# Allegro board ESP32_WROVER_ITESO_BRD_O2024.brd
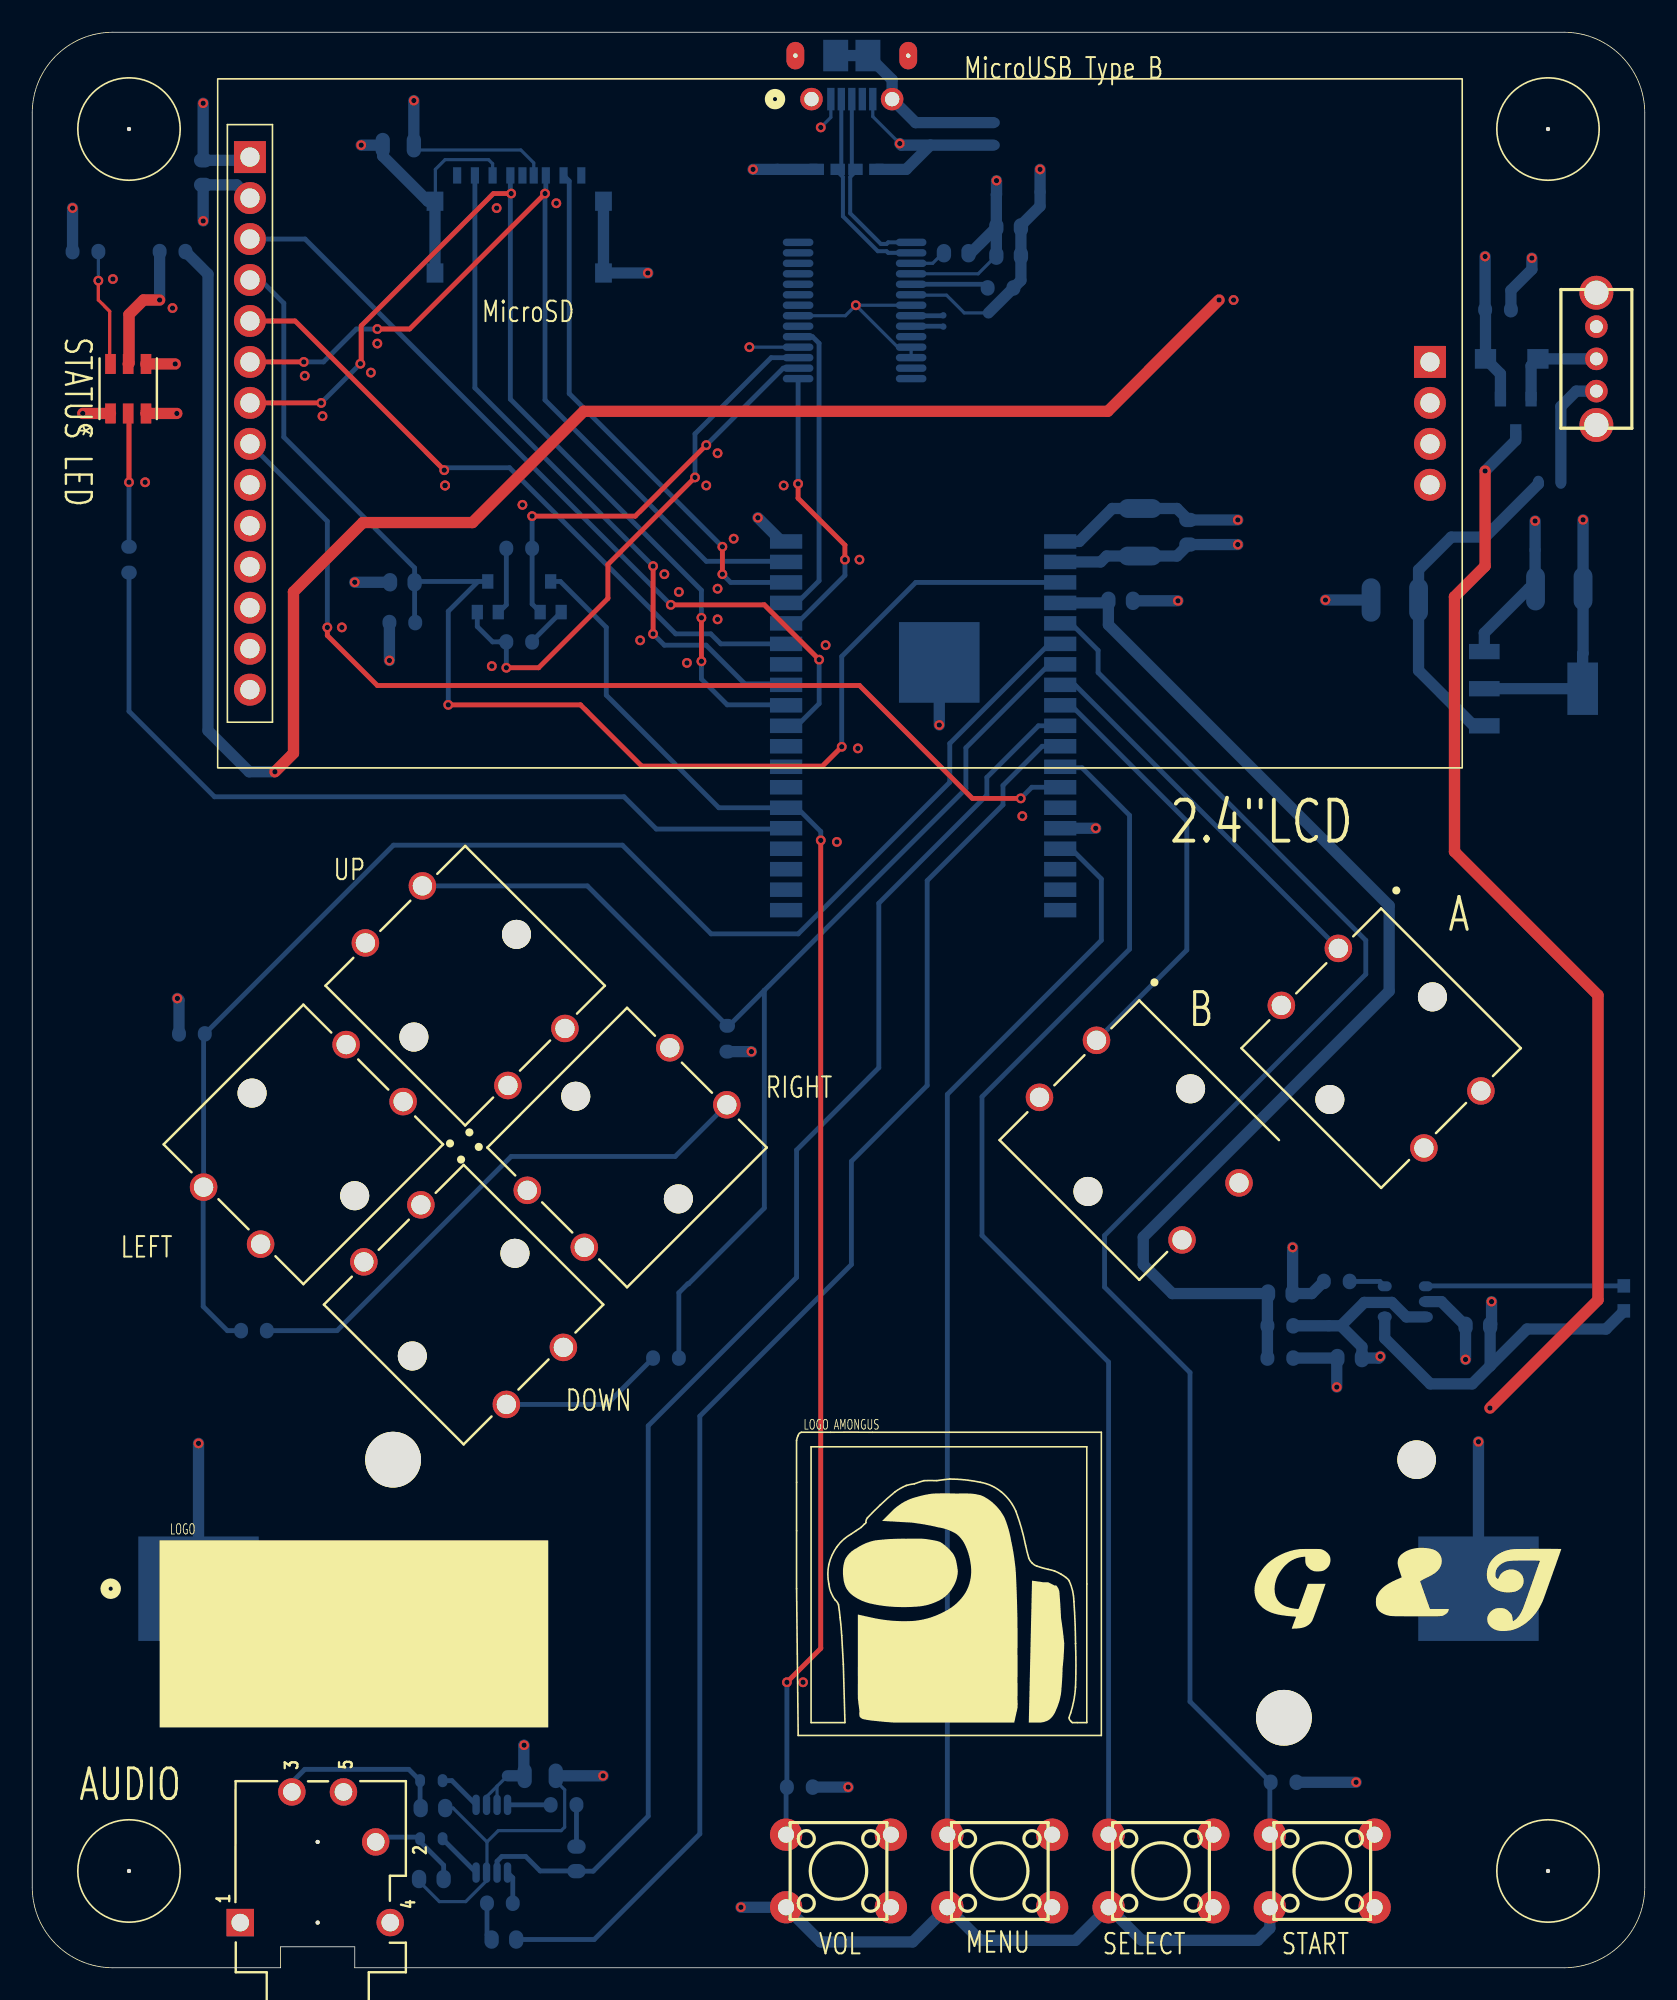
[diagram p0: board, top side]
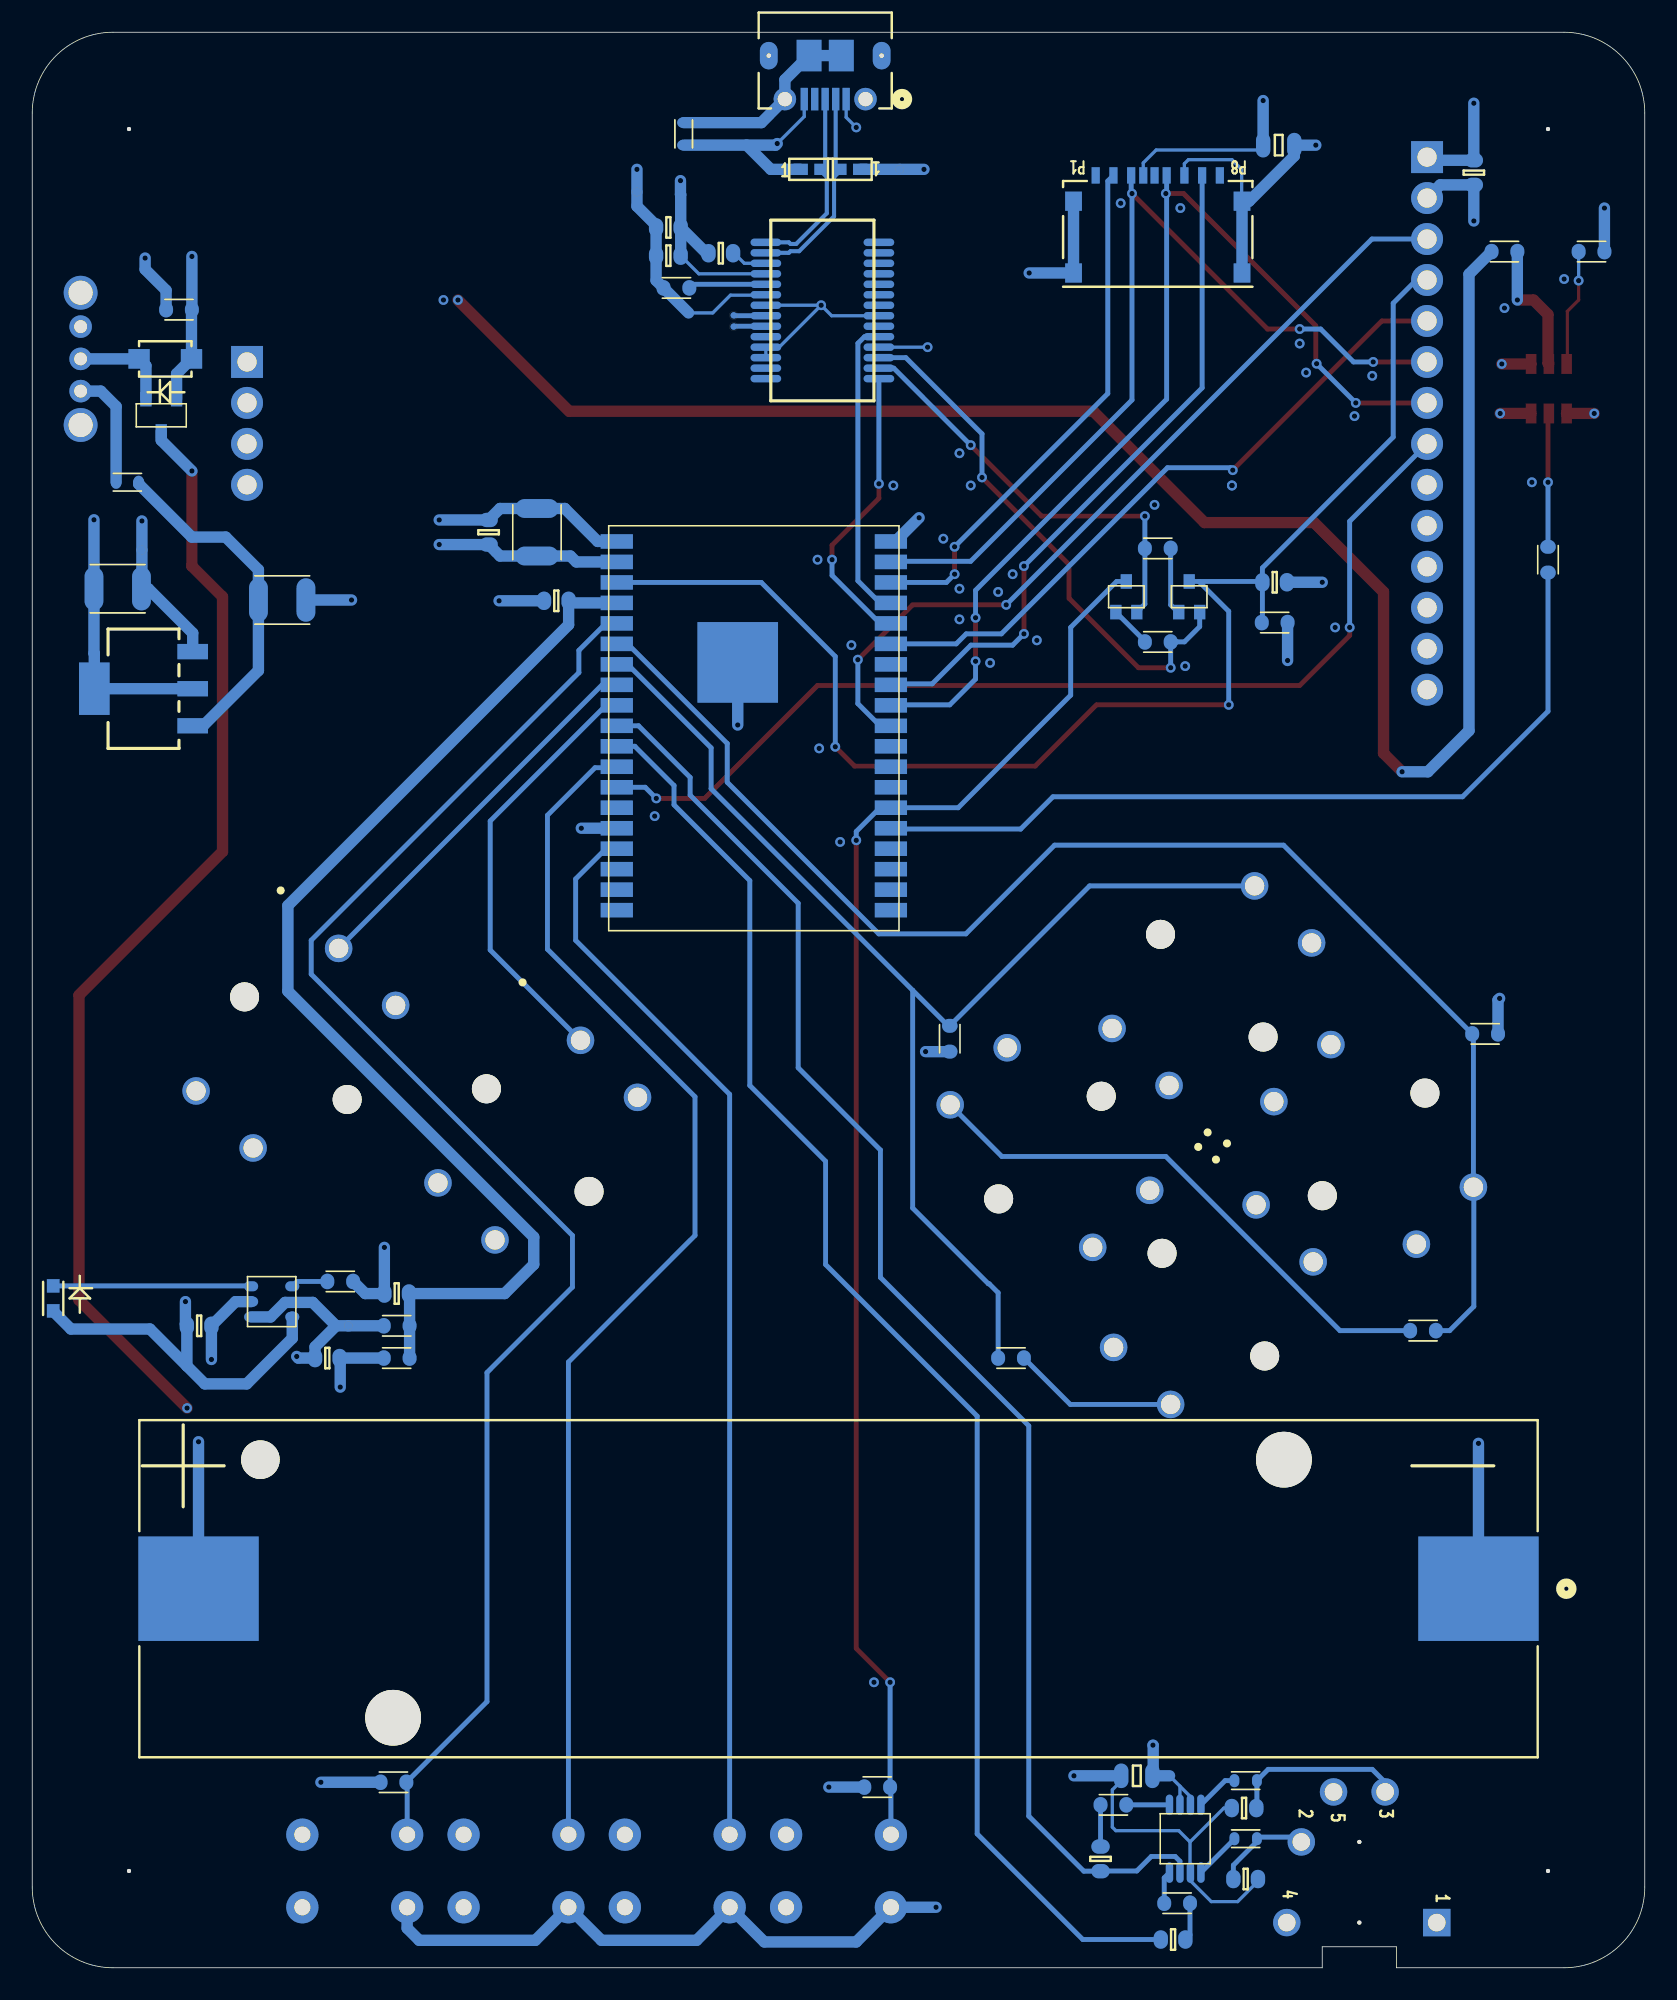
[diagram p1: board, bottom side, seen from below]

Outline 100 x 120 mm; copper layers: TOP, PWR, GND, BOTTOM. Coordinates in mm from the lower left corner of the outline.
Outline path: 0,115 0,5 arc(1.46,1.46) 5,0 15.4,0 15.4,1.3 20,1.3 20,0 95,0 arc(98.54,1.46) 100,5 100,115 arc(98.54,118.54) 95,120 5,120 arc(1.46,118.54) 0,115

## Design rules (mm)
constraint set DEFAULT: 
net group USB_D: nets USB_DN USB_DP
net group EC_AUDIO: nets AUDIO_IN+ AUDIO_IN+_R AUDIO_IN- AUDIO_IN-_R AUDIO_OUT+ AUDIO_OUT+_L AUDIO_OUT- AUDIO_OUT-_L
net group EC_MISC: nets CBUS0 CBUS1 FT232_RST IO0 IO2 IO4 IO12 IO13 IO14 IO15 IO21 IO25 IO26 IO27 IO32 IO33 IO34 IO34_R IO35 IO35_R IO36 IO39 ISEN_CHRGR N00559 RESET STATUS_LED
net group EC_UART: nets DTR_N DTR_N_R RTS_N RTS_N_R UART_RXD UART_TXD
net group PWR: nets FT232_P3V3OUT P3V3_LED P5V0_P3V7 P5V0_P3V7_IN P5V0_P3V7_L P5V0_USB_LED

## Placement (name value [footprint] x y rotation side)
C1  0.1uF  [CC0603_OV]  77.4 41.8 180 bottom
C2  0.1uF  [CC0603_OV]  81.7 37.8 0 bottom
C3  47uF  [CC1210_OV]  84.5 84.8 0 bottom
C4  47uF  [CC1210_OV]  94.7 85.5 180 bottom
C5  4.7uF  [CC0603_OV]  89.65 39.8 0 bottom
C6  47uF  [CC1210_OV]  68.7 89 270 bottom
C7  0.1uF  [CC0603_OV]  71.7 89 270 bottom
C8  0.1uF  [CC0603_OV]  67.5 84.75 180 bottom
C9  0.1uF  [CC0603_OV]  22.95 85.9 0 bottom
C11  4.7uF  [CC0603_OV]  60.55 106.15 0 bottom
C12  0.1uF  [CC0603_OV]  60.55 107.9 0 bottom
C13  0.1uF  [CC0603_OV]  57.3 106.3 0 bottom
C15  10uF  [CC0805_OV]  22.7 113 0 bottom
C16  0.1uF  [CC0603_OV]  10.6 111.3 90 bottom
C18  0.1uF  [CC0603_OV]  29.25 1.75 180 bottom
C19  0.1uF  [CC0603_OV]  33.75 6.75 90 bottom
C20  220pF  [CC0603_OV]  24.85 9.9 180 bottom
C21  220pF  [CC0603_OV]  24.75 5.5 0 bottom
C22  10uF  [CC0805_OV]  31.5 11.9 180 bottom
D1  598-8060-107F  [LED_0603]  98.7 41.5 90 bottom
D2  MBR120VLSFT1G  [SOD-123]  91.75 99.75 0 bottom
D3  0402ESDA-MLP1  [0402_MLP]  51.7 111.5 180 bottom
D4  0402ESDA-MLP1  [0402_MLP]  49.3 111.5 0 bottom
D8  SMD06_LED_E3635_3P5X3P3  [SMD06_LED_E3635_3P5X3P3_OSR]  5.95 97.9 90 top
J2  SJ-43515TS  [CON5_AUD_JACK_RA_TH_SJ-43515TS]  12.9 2.8 90 top
J4  2.4" 240x320 SPI TFT ILI9341 with SD  [TFT_2P4_INCH_18PIN]  13.5 95.75 0 top
J5  1050270001  [CON8_SDCARD_PUSH_SM]  30.2 107.2 0 bottom
J6  1042P  [1042P_KEY]  50 23.5 0 bottom
J7  1050170001  [CONN_1050170001_MOL]  50.83 118.25 0 bottom
L1  330  [L0603_OV]  94.1 92.1 180 bottom
L2  330  [L0603_OV]  59.6 113.7 90 bottom
L3  330  [L0603_OV]  24.75 11.6 0 bottom
L4  330  [L0603_OV]  24.75 8 0 bottom
LOGO  -  [#2]  7.9 14.9 0 top
LOGO AMONGUS  -  [#2]  47.8 13.4 0 top
NOREF  -  [unnamed]  6 114 0 top
NOREF#2  -  [unnamed]  6 6 0 top
NOREF#3  -  [#2]  85.1 24 0 top
NOREF#4  -  [unnamed]  94 114 0 top
NOREF#5  -  [unnamed]  94 6 0 top
Q1  SSF1341  [SOT23-3]  92 96.25 270 bottom
Q2  MMBT3904WT1G  [SOT323]  28.25 85 90 bottom
Q3  MMBT3904WT1G  [SOT323]  32.15 85 90 bottom
R1  2K  [R0603_OV]  80.9 42.55 0 bottom
R2  2K  [R0603_OV]  8.7 106.4 180 bottom
R3  2K  [R0603_OV]  3.3 106.4 0 bottom
R4  100K  [R0603_OV]  77.4 39.8 0 bottom
R5  100K  [R0603_OV]  77.4 37.8 180 bottom
R6  100K  [R0603_OV]  90.9 102.8 180 bottom
R7  10K  [R0603_OV]  22.95 83.4 180 bottom
R8  10K  [R0603_OV]  30.2 88 0 bottom
R9  10K  [R0603_OV]  30.2 82.2 180 bottom
R10  2K  [R0603_OV]  6 87.3 90 bottom
R14  10K  [R0603_OV]  60.05 104.15 0 bottom
R15  100K  [R0603_OV]  32.95 10.1 180 bottom
R16  100K  [R0603_OV]  29 4 0 bottom
R17  10K  [R0603_OV]  43.1 57.6 90 bottom
R18  10K  [R0603_OV]  39.3 37.8 0 bottom
R19  10K  [R0603_OV]  9.9 57.9 0 bottom
R20  10K  [R0603_OV]  13.75 39.5 180 bottom
R21  10K  [R0603_OV]  77.6 11.5 0 bottom
R22  10K  [R0603_OV]  47.6 11.2 0 bottom
SW1  OS102011MA1QN1  [SLIDE_SWITCH]  97 99.75 180 top
SW2  B3F-1  [SW_B3F-4050_OMR]  29.5 54.7 135 top
SW3  B3F-1  [SW_B3F-4050_OMR]  24.1 47.3 315 top
SW4  B3F-1  [SW_B3F-4050_OMR]  23 53.7 225 top
SW5  B3F-1  [SW_B3F-4050_OMR]  30.7 48.2 45 top
SW6  PTS645SH432LFS  [SWITCH_6X6]  60 6 0 top
SW7  PTS645SH432LFS  [SWITCH_6X6]  50 6 0 top
SW8  PTS645SH432LFS  [SWITCH_6X6]  70 6 0 top
SW9  PTS645SH432LFS  [SWITCH_6X6]  80 6 0 top
SW10  B3F-1  [SW_B3F-4050_OMR]  66 57.5 315 top
SW11  B3F-1  [SW_B3F-4050_OMR]  81 63.2 315 top
TP1  TestPoint 40  [TP]  46.2 111.5 180 bottom
TP2  TestPoint 40  [TP]  62.5 110.1 180 bottom
TP3  TestPoint 40  [TP]  80.4 39.8 180 bottom
TP4  TestPoint 40  [TP]  93.2 87.9 180 bottom
TP5  TestPoint 40  [TP]  56.5 102.45 180 bottom
TP6  TestPoint 40  [TP]  56.5 101.75 180 bottom
U4  FT232R  [SSOP28]  51 102.75 0 bottom
U6  XC6802A42XMR-G  [SOT23-5]  85.15 41.3 180 bottom
U7  MCP1825ST-3302E/DB  [SOT223-4A]  93.1 79.3 0 bottom
U8  ESP32-WROVER-B (16Mb)  [LCC39_WROVERB]  55.25 77 180 bottom
U9  PAM8304ASR  [MSOP8]  28.5 8 270 bottom

## Library data of the parts
C1 C2 C7-C9 C12 C13 C16 C18 C19 = CAP SMD 0.1uF 16V 10% X7R 0603
C3 C4 C6 = CAP SMD 47uF 16V 20% X5R 1210
C5 C11 = CAP SMD 4.7uF 16V 10% X7S 0603
C15 C22 = CAP SMD 10uF 10V X7R 0805
C20 C21 = CAP SMD 220pF 50V 10% X7R 0603
D1 = LED SMD YLW/GRN 0603
D2 = DIODE MBR120VLSFT1G SOD123
D3 D4 = DIODE TVS BIDIR 0402
D8 = LRTBGVSR-U4V2-JWA6BB-D8S2U2-7Z-: User Part Number: PN; Tolerance: TOL
J2 = Audio Jack 3.5mm SJ-43515TS
J4 = TFT2.4_SPI_18pin
J5 = CON8_SDCARD_SW_0
J6 = 1042P_BATTERY_HOLDER: User Part Number: PN; Tolerance: TOL
J7 = CONN2 Micro USB Type AB_0: User Part Number: PN; Tolerance: TOL
L1-L4 = IND FER-BEAD 330 1.7A 0603
Q1 = TRANS P-CH 12V 3_3.5A SOT23
Q2 Q3 = TRANS BJT NPN 40V 0_0.2A SOT323
R1-R3 R10 = RES SMD 2K 5% 0_0.1W 0603
R4-R6 R15 R16 = RES SMD 100K 5% 0_1.1W 0603
R7-R9 R14 R17-R22 = RES SMD 10K 5% 0_1.25W 0603
SW1 = SW OS102011MA1QN1
SW2-SW5 SW10 SW11 = B3F-4050: User Part Number: PN; Tolerance: TOL
SW6-SW9 = PUSHBUTTON_PTS645SH432LFS_6x6
TP1-TP6 = TestPoint 40_0
U4 = TMP_0
U6 = XC6802A42XMR-G_0
U7 = MCP1825S
U8 = ESP32_WROVER-B_2
U9 = PAM8304ASR

## Footprints (pads in the part's own frame, mm; a bottom-side part is the same pattern mirrored in y, then rotated)
0402_MLP
  rect 0.9x0.7 smd: 1(-0.65,0) 2(0.65,0)
1042P_KEY
  round 3.454 hole 3.454 unplated: (-27.622,-8.001) (27.622,8.001)
  round 2.388 hole 2.388 unplated: (35.852,-8.001)
  rect 7.468x6.477 smd: 1(-39.688,0) 2(39.688,0)
CC0603_OV
  oval 0.889x1.143 smd: 1(-0.762,0) 2(0.762,0)
CC0805_OV
  oval 0.889x1.524 smd: 1(-0.965,0) 2(0.965,0)
CC1210_OV
  oval 1.168x2.692 smd: 1(-1.473,0) 2(1.473,0)
CON5_AUD_JACK_RA_TH_SJ-43515TS
  round 0.254 hole 1.092 unplated: (0,-4.8) (5,-4.8)
  rect 1.702x1.702 hole 1.092: 1(0,0)
  round 1.702 hole 1.092: 2(5,-8.4) 3(8.1,-3.2) 4(0,-9.3) 5(8.1,-6.4)
CON8_SDCARD_PUSH_SM
  rect 0.508x1.016 smd: G1(0.2,-3.925) P1(3.85,-3.925) P2(2.75,-3.925) P3(1.65,-3.925) P4(0.9,-3.925) P5(-0.55,-3.925) P6(-1.65,-3.925) P7(-2.75,-3.925) P8(-3.85,-3.925)
  rect 1.041x1.194 smd: S1(5.225,-2.325) S2(5.225,2.125) S3(-5.225,2.125) S4(-5.225,-2.325)
CONN_1050170001_MOL
  rect 0.457x1.397 smd: 1(-1.3,2.395) 2(-0.65,2.395) 3(0,2.395) 4(0.65,2.395) 5(1.3,2.395)
  custom 1.1x1.7 hole 0.6x1.2: S1(-3.5,-0.3) S2(3.5,-0.3)
  round 1.397 hole 0.889: S3(-2.5,2.395) S4(2.5,2.395)
  rect 1.549x1.956 smd: S5(-1,-0.305) S6(1,-0.305)
L0603_OV
  oval 0.61x0.813 smd: 1(-0.698,0) 2(0.698,0)
LCC39_WROVERB
  rect 2x0.9 smd: 1(-8.5,11.43) 2(-8.5,10.16) 3(-8.5,8.89) 4(-8.5,7.62) 5(-8.5,6.35) 6(-8.5,5.08) 7(-8.5,3.81) 8(-8.5,2.54) 9(-8.5,1.27) 10(-8.5,0) 11(-8.5,-1.27) 12(-8.5,-2.54) 13(-8.5,-3.81) 14(-8.5,-5.08) 15(-8.5,-6.35) 16(-8.5,-7.62) 17(-8.5,-8.89) 18(-8.5,-10.16) 19(-8.5,-11.43) 20(8.5,-11.43) 21(8.5,-10.16) 22(8.5,-8.89) 23(8.5,-7.62) 24(8.5,-6.35) 25(8.5,-5.08) 26(8.5,-3.81) 27(8.5,-2.54) 28(8.5,-1.27) 29(8.5,0) 30(8.5,1.27) 31(8.5,2.54) 32(8.5,3.81) 33(8.5,5.08) 34(8.5,6.35) 35(8.5,7.62) 36(8.5,8.89) 37(8.5,10.16) 38(8.5,11.43)
  rect 5x5 smd: 39(-1,3.93)
LED_0603
  rect 0.838x0.787 smd: A(-0.775,0) C(0.775,0)
MSOP8
  oval 1.27x0.46 smd: 1(-2.1,0.975) 2(-2.1,0.325) 3(-2.1,-0.325) 4(-2.1,-0.975) 5(2.1,-0.975) 6(2.1,-0.325) 7(2.1,0.325) 8(2.1,0.975)
R0603_OV
  oval 0.864x0.965 smd: 1(-0.8,0) 2(0.8,0)
SLIDE_SWITCH
  round 1.4 hole 0.8: 1(0,2) 2(0,0) 3(0,-2)
  round 2.1 hole 1.5: MH1(0,4.1) MH2(0,-4.1)
SMD06_LED_E3635_3P5X3P3_OSR
  rect 1.239x0.66 smd: 1(-1.534,1.1) 2(-1.534,0) 3(-1.534,-1.1) 4(1.534,-1.1) 5(1.534,0) 6(1.534,1.1)
SOD-123
  rect 1.321x1.219 smd: A(-1.626,0) C(1.626,0)
SOT23-3
  rect 0.9x0.7 smd: 1(-1,0.95) 2(-1,-0.95) 3(1,0)
SOT23-5
  oval 0.87x0.62 smd: 1(-1.275,0.95) 2(-1.275,0) 3(-1.275,-0.95) 4(1.275,-0.95) 5(1.275,0.95)
SOT223-4A
  rect 1.9x0.95 smd: 1(-3.05,2.3) 2(-3.05,0) 3(-3.05,-2.3)
  rect 1.9x3.25 smd: 4(3.05,0)
SOT323
  rect 0.9x0.7 smd: 1(-0.95,0.65) 2(-0.95,-0.65) 3(0.95,0)
SSOP28
  oval 1.9x0.46 smd: 1(-3.505,4.225) 2(-3.505,3.575) 3(-3.505,2.925) 4(-3.505,2.275) 5(-3.505,1.625) 6(-3.505,0.975) 7(-3.505,0.325) 8(-3.505,-0.325) 9(-3.505,-0.975) 10(-3.505,-1.625) 11(-3.505,-2.275) 12(-3.505,-2.925) 13(-3.505,-3.575) 14(-3.505,-4.225) 15(3.505,-4.225) 16(3.505,-3.575) 17(3.505,-2.925) 18(3.505,-2.275) 19(3.505,-1.625) 20(3.505,-0.975) 21(3.505,-0.325) 22(3.505,0.325) 23(3.505,0.975) 24(3.505,1.625) 25(3.505,2.275) 26(3.505,2.925) 27(3.505,3.575) 28(3.505,4.225)
SW_B3F-4050_OMR
  round 1.8 hole 1.8 unplated: (6.25,2) (6.25,-7)
  round 1.708 hole 1.2: 1(0,0) 2(0,-5) 3(12.5,-5) 4(12.5,0)
SWITCH_6X6
  round 2 hole 1: 1(-3.25,2.25) 2(3.25,2.25) 3(-3.25,-2.25) 4(3.25,-2.25)
TFT_2P4_INCH_18PIN
  rect 1.981x1.981 hole 1.194: 1(0,16.51) 15(73.18,3.81)
  round 1.981 hole 1.194: 2(0,13.97) 3(0,11.43) 4(0,8.89) 5(0,6.35) 6(0,3.81) 7(0,1.27) 8(0,-1.27) 9(0,-3.81) 10(0,-6.35) 11(0,-8.89) 12(0,-11.43) 13(0,-13.97) 14(0,-16.51) 16(73.18,1.27) 17(73.18,-1.27) 18(73.18,-3.81)
TP
  round 0.4 smd: 1(0,0)
unnamed
  round 0.254 hole 3.175 unplated: (0,0)

## Nets
GND: C1.1 C2.1 C3.1 C4.1 C5.1 C6.1 C7.1 C8.1 C9.1 C11.1 C12.1 C13.2 C15.1 C16.1 C20.1 C21.1 C22.1 D3.1 D4.1 D8.1 D8.3 D8.4 J2.4 J4.2 J5.P6(VSS) J5.S1 J5.S2 J5.S3 J5.S4 J6.1(-) J7.5 L2.1 R1.1 R5.1 R6.1 R17.1 R19.1 SW1.MH1 SW1.MH2 SW6.3 SW7.3 SW8.3 SW9.3 SW10.3 SW11.3 TP1.1(PIN1) U4.7 U4.18 U4.21 U4.25 U4.26 U6.2 U7.2 U7.4 U8.1 U8.15 U8.38 U8.39 U9.7
GND_SHLD: J7.S1 J7.S2 J7.S3 J7.S4 J7.S5 J7.S6(SHLD6) L2.2
P3V3: C4.2 C6.2 C7.2 C15.2 C16.2 C22.2 J4.1(VCC) J5.P4 R3.1 R7.2 R21.2 R22.2 SW2.1 SW3.1 SW4.1 SW5.1 TP4.1(PIN1) U4.4(VCCIO) U7.3(VOUT) U8.2 U9.2 U9.3
P3V3_LED: D8.6 R3.2
P3V7_VBAT: C2.2 J6.2 Q1.3 R4.2 TP3.1(PIN1) U6.3
P5V0_P3V7: D2.C Q1.2(S) SW1.2
P5V0_P3V7_IN: C3.2 L1.2 U7.1
P5V0_P3V7_L: L1.1 SW1.1
P5V0_USB: C5.2 C11.2 C12.2 D1.A D2.A J7.1 Q1.1 R2.1 R6.2 R14.2 TP2.1(PIN1) U4.20 U6.4
P5V0_USB_LED: D8.5 R2.2
AUDIO_IN+: R16.2 U9.5
AUDIO_IN+_R: C18.2 R16.1
AUDIO_IN-: R15.2 U9.4
AUDIO_IN-_R: C19.2 R15.1
AUDIO_OUT+: C20.2 J2.3 L3.1
AUDIO_OUT+_L: L3.2 U9.1
AUDIO_OUT-: C21.2 J2.2 L4.1
AUDIO_OUT-_L: L4.2 U9.8
CBUS0: TP6.1(PIN1) U4.23
CBUS1: TP5.1(PIN1) U4.22
DTR_N: Q3.2(E) R8.2 U4.2
DTR_N_R: Q2.1 R8.1
FT232_P3V3OUT: C13.1 U4.17
FT232_RST: R14.1 U4.19
IO0: Q3.3 R22.1 SW7.1 U8.25
IO2: R10.1 U8.24
IO4: U8.26
IO12: U8.14
IO13: SW6.1 U8.16
IO14: J4.8 U8.13
IO15: U8.23
IO21: J4.5 U8.33
IO25: C19.1 U8.10 U9.6(\S\D)
IO26: C18.1 U8.11
IO27: SW8.1 U8.12
IO32: SW11.1 U8.8
IO33: SW10.1 U8.9
IO34: R19.2 R20.2 SW4.3 U8.6
IO34_R: R20.1 SW5.3
IO35: R17.2 R18.2 SW2.3 U8.7
IO35_R: R18.1 SW3.3
IO36: C1.2 C8.2 R4.1 R5.2 U8.4
IO39: R21.1 SW9.1 U8.5
ISEN_CHRGR: R1.2 U6.5
RESET: C9.2 J4.4 Q2.3 R7.1 U8.3
RTS_N: Q2.2(E) R9.2 U4.3
RTS_N_R: Q3.1 R9.1
SPI_CS0: J4.3 U8.29
SPI_CS1: J5.P2 U8.36
SPI_MISO: J5.P7 U8.31
SPI_MOSI: J4.6 J5.P3 U8.37
SPI_SCK: J4.7 J5.P5 U8.30
STATUS_LED: D8.2 R10.2
UART_RXD: U4.1 U8.34
UART_TXD: U4.5 U8.35(TXD0)
USB_DN: D4.2(A2) J7.2 U4.16
USB_DP: D3.2(A2) J7.3 U4.15
N00559: D1.C(CATHODE) U6.1(\C\H\G)

Pads without a net: J2 1 5; J4 9 10 11 12 13 14 15 16 17 18; J5 G1 P1 P8; J7 4; SW1 3; SW2 2 4; SW3 2 4; SW4 2 4; SW5 2 4; SW6 2 4; SW7 2 4; SW8 2 4; SW9 2 4; SW10 2 4; SW11 2 4; U4 6 8 9 10 11 12 13 14 24 27 28; U8 17 18 19 20 21 22 27 28 32

## Via types
v1: diameter 0.61, hole 0.33, TOP to BOTTOM, 108 vias

## Routing (per net, layer and track width the routed paths; a pad name or vN(x,y) marks a point on that pad's centre or on a via; arc(x,y) is an arc through that point)
GND: length 257.1
  TOP w0.7: D8.3 v1(8.97,96.37) ; D8.4 v1(8.87,99.43) ; D8.1 v1(3.13,96.37)
  GND w0.7: 45.5,3.75 SW7.3 ; SW7.3 46.75,5 ; SW7.3 46.75,2.5 ; SW7.3 48,3.75 ; SW9.3 76.75,5 ; SW9.3 75.5,3.75 ; SW9.3 76.75,2.5 ; SW9.3 78,3.75 ; 97,94.35 SW1.MH1 ; SW1.MH1 98.3,95.65 ; SW1.MH1 95.7,95.65 ; 85.2,50.83 SW11.3 ; SW11.3 87.41,50.83 ; SW11.3 86.3,49.72 ; SW11.3 86.3,51.93 ; J2.4 23.3,2.8 ; J2.4 22.2,3.9 ; J2.4 21.1,2.8 ; J2.4 22.2,1.7 ; 65.5,3.75 SW8.3 ; SW8.3 66.75,5 ; SW8.3 68,3.75 ; SW8.3 66.75,2.5 ; SW10.3 72.41,45.13 ; SW10.3 71.3,44.02 ; SW10.3 71.3,46.23 ; SW10.3 70.2,45.13 ; SW6.3 58,3.75 ; SW6.3 56.75,2.5 ; SW6.3 56.75,5 ; SW6.3 55.5,3.75 ; SW1.MH2 98.3,103.85 ; SW1.MH2 95.7,103.85 ; SW1.MH2 97,105.15
  BOTTOM w0.2: C11.1 58.66,105.03 U4.18 ; J5.P6 28.55,111.85 28.3,112.1 25.6,112.1 25,111.5 25,109.55 J5.S4 ; C22.1 32.47,11.58 33.02,11.03 33.02,8.72 32.8,8.5 28.9,8.5 28.2,7.8 ; 28.2,7.8 26.1,9.9 C20.1 ; 28.2,7.8 28.2,5.92 U9.7 28.18,5.39 26.88,4.1 25.25,4.1 23.99,5.36 C21.1 ; v1(53.8,113.1) 52.12,114.78 J7.5 ; v1(51.08,103.08) 50.42,102.42 U4.7 ; v1(51.08,103.08) U4.21 ; v1(51.08,103.08) 53.67,100.47 U4.25 U4.26
  BOTTOM w0.7: v1(53.8,113.1) 53.9,113 55.7,113 ; C11.1 C12.1 ; C12.1 58.19,106.3 C13.2 ; C12.1 59.79,109.93 59.8,109.94 v1(59.8,110.8) ; 80.1,42.63 R1.1 79.35,41.8 C1.1 v1(78.16,44.66) ; v1(9,60.1) 9.1,60 R19.1 ; U8.1 64.93,88.43 66.97,90.47 C6.1 70.99,90.47 C7.1 v1(74.76,89.76) ; 86.42,41.3 87.39,41.3 C5.1 v1(88.89,37.71) ; D4.1 TP1.1 v1(44.7,111.5) ; v1(35.4,11.9) C22.1 ; U8.38 46.47,88.43 v1(45,89.9) ; J4.2 12.68,110.54 C16.1 v1(10.6,108.3) ; v1(43.95,3.75) SW7.3 48.9,1.6 54.6,1.6 SW6.3 58.8,1.7 64.7,1.7 SW8.3 68.8,1.7 76,1.7 76.75,2.45 SW9.3 ; U7.2 U7.4 96.15,81.47 96.17,81.5 C4.1 v1(96.17,89.77) ; 55.7,113 L2.1 ; 55.7,113 54.2,111.5 D3.1 ; v1(20.4,113) C15.1 21.73,112.33 24.54,109.53 J5.S4 J5.S3 ; U8.15 v1(65.95,70.65) ; v1(93,106) 93,105.3 91.7,104 R6.1 ; U8.39 v1(56.25,77.05) ; v1(80.9,36) 80.9,37.76 C2.1 R5.1 ; C8.1 v1(71.05,84.75) ; C9.1 v1(20,85.9) ; J6.1 v1(10.31,32.51) ; J5.S1 J5.S2 v1(38.17,105.08) ; C3.1 v1(80.2,84.8) ; v1(44.6,56.8) R17.1
  vias: v1(5,104.7) v1(7,92.1) v1(8.7,102.9) v1(16.9,98.7) v1(18,96.2) v1(19.2,83.1) v1(21,98.9) v1(21.4,100.7) v1(25.6,91.9) v1(25.6,91.9) v1(28.5,80.7) v1(28.8,109.1) v1(30.4,90.7) v1(32.5,109.4) v1(37.7,82.3) v1(39.2,86.4) v1(40.1,85.3) v1(40.6,80.9) v1(41.8,91.9) v1(42.5,93.9) v1(42.5,85.5) v1(42.5,83.6) v1(43.5,88.6) v1(46.6,91.9) v1(47.8,17.7) v1(49.2,82) v1(49.9,69.8) v1(51.2,75.6) v1(51.3,87.3) v1(61.4,71.4) v1(74.5,103.4)
GND_SHLD: length 24.5
  GND w0.7: J7.S3 49.28,115.86 ; J7.S3 48.33,116.81 ; J7.S3 47.37,115.86 ; J7.S3 48.33,114.9 ; J7.S4 53.33,116.81 ; J7.S4 53.33,114.9 ; J7.S4 54.28,115.86 ; J7.S4 52.37,115.86 ; 46.67,118.55 J7.S1 ; J7.S1 47.33,117.5 ; J7.S1 47.98,118.55 ; 54.33,117.5 J7.S2 ; J7.S2 53.67,118.55 ; J7.S2 54.98,118.55
  BOTTOM w0.7: L2.2 54.78,114.4 J7.S4 53.33,117.06 J7.S6 J7.S5
P3V3: length 77.3
  PWR w0.7: 23,52.59 SW4.1 ; SW4.1 21.89,53.7 ; SW4.1 24.11,53.7 ; SW4.1 23,54.81 ; SW5.1 31.81,48.2 ; SW5.1 29.59,48.2 ; SW5.1 30.7,49.31 ; SW5.1 30.7,47.09 ; 24.1,46.19 SW3.1 ; SW3.1 22.99,47.3 ; SW3.1 24.1,48.41 ; SW3.1 25.21,47.3 ; 28.39,54.7 SW2.1 ; SW2.1 29.5,53.59 ; SW2.1 29.5,55.81 ; SW2.1 30.61,54.7
  BOTTOM w0.2: C15.2 23.96,112.7 30.3,112.7 31.1,111.9 J5.P4 ; U9.2 28.18,10.61 28.82,11.26 ; 28.82,11.26 U9.3 ; 28.82,11.26 29.47,11.9 ; U4.4 v1(44.48,100.47)
  BOTTOM w0.7: 29.47,11.9 C22.2 30.48,11.95 30.48,13.79 v1(30.5,13.8) ; J4.1 13.3,112.06 C16.2 v1(10.6,115.6) ; C15.2 v1(23.66,115.77) ; U8.2 66.26,87.16 66.63,87.53 C6.2 70.99,87.53 C7.2 v1(74.76,88.24) ; R3.1 v1(2.5,109.1) ; R22.2 v1(50.6,11.2) ; U7.3 90.05,82.75 92.8,85.5 C4.2 93.2,85.53 TP4.1 v1(93.2,89.7) ; R21.2 v1(82.1,11.5) ; R7.2 v1(22.15,81.05)
P3V3_LED: length 7.3
  TOP w0.2: D8.6 4.8,99.48 4.8,102.7 4.1,103.4 v1(4.1,104.6)
  BOTTOM w0.2: R3.2 v1(4.1,104.6)
P3V7_VBAT: length 90.6
  TOP w0.7: v1(90.4,34.7) 97.1,41.4 97.1,60.3 88.2,69.2 88.2,85 90.1,86.9 v1(90.1,92.8)
  BOTTOM w0.7: J6.2 v1(89.69,32.61) ; v1(90.1,92.8) 92,94.7 Q1.3 ; 86.42,40.35 85.22,40.35 84.32,41.25 82.61,41.25 81.16,39.8 ; 81.16,39.8 82.46,38.49 C2.2 83.5,37.8 v1(83.6,37.9) ; 81.16,39.8 TP3.1 R4.2
P5V0_P3V7: length 6.3
  BOTTOM w0.7: Q1.2 92.95,99.32 D2.C SW1.2
P5V0_P3V7_IN: length 21.5
  BOTTOM w0.7: U7.1 89.4,77 85.97,80.43 C3.2 85.97,86.67 88,88.7 90.1,88.7 93.4,92 L1.2
P5V0_P3V7_L: length 7.3
  BOTTOM w0.7: L1.1 94.8,96.8 95.75,97.75 SW1.1
P5V0_USB: length 162
  TOP w0.7: v1(15.05,74.15) 16.2,75.3 16.2,85.3 20.5,89.6 27.3,89.6 34.2,96.5 66.7,96.5 v1(73.6,103.4)
  BOTTOM w0.2: 59.3,102.6 57.8,102.6 56.7,103.7 54.53,103.7 U4.20 ; 49.52,115.86 49.52,114.72 v1(48.9,114.1)
  BOTTOM w0.7: v1(90.1,106.1) R6.2 90.1,102.7 90.12,102.68 D2.A 91.05,98.82 Q1.1 ; 90.41,37.31 89.3,36.2 86.7,36.2 83.88,39.03 U6.4 ; 90.41,37.31 C5.2 90.5,39.89 v1(90.5,41.3) ; 90.41,37.31 92.7,39.6 97.6,39.6 98.7,40.7 D1.A ; R2.1 10.9,105 10.9,76.7 13.45,74.15 v1(15.05,74.15) ; 59.3,102.6 R14.2 61.31,104.61 C11.2 C12.2 61.31,108.03 62.5,109.22 TP2.1 v1(62.5,111.5)
P5V0_USB_LED: length 8.4
  TOP w0.7: v1(7.9,103.4) 6.9,103.4 6,102.5 6,99.48 D8.5
  BOTTOM w0.7: R2.2 v1(7.9,103.4)
AUDIO_IN+: length 2
  BOTTOM w0.3: R16.2 29.8,5.58 U9.5
AUDIO_IN+_R: length 2.4
  BOTTOM w0.3: C18.2 28.2,2.04 R16.1
AUDIO_IN-: length 2.7
  BOTTOM w0.3: R15.2 U9.4
AUDIO_IN-_R: length 2.6
  BOTTOM w0.3: C19.2 R15.1
AUDIO_OUT+: length 10.9
  BOTTOM w0.3: J2.3 16.1,11.5 16.9,12.3 23.35,12.3 L3.1 24.05,9.94 C20.2
AUDIO_OUT+_L: length 2.7
  BOTTOM w0.3: L3.2 26.02,11.6 U9.1
AUDIO_OUT-: length 6
  BOTTOM w0.3: C21.2 25.51,6.36 24.05,7.82 L4.1 23.95,8.1 21.6,8.1 J2.2
AUDIO_OUT-_L: length 3
  BOTTOM w0.3: L4.2 25.45,7.98 U9.8
CBUS0: length 2
  BOTTOM w0.3: TP6.1 56.48,101.78 U4.23
CBUS1: length 2
  BOTTOM w0.3: TP5.1 56.45,102.45 56.42,102.42 U4.22
DTR_N: length 26.5
  TOP w0.3: v1(31,90) 37.4,90 v1(41.8,94.4)
  BOTTOM w0.3: v1(31,90) R8.2 31,84.55 Q3.2 ; v1(41.8,94.4) 46.58,99.17 U4.2
DTR_N_R: length 4.2
  BOTTOM w0.3: Q2.1 28.95,84.05 29.4,84.5 R8.1
FT232_P3V3OUT: length 2.3
  BOTTOM w0.2: U4.17 55.84,105.67 56.47,106.3 C13.1
FT232_RST: length 4.8
  BOTTOM w0.3: R14.1 59.02,104.38 U4.19
IO0: length 88.7
  TOP w0.3: v1(46.8,17.7) 48.9,19.8 v1(48.9,69.9)
  BOTTOM w0.3: Q3.3 32.75,85.95 35.6,83.1 35.6,78.9 42.58,71.92 U8.25 47.42,71.92 48.9,70.44 v1(48.9,69.9) ; v1(46.8,17.7) R22.1 46.75,11.15 SW7.1
IO2: length 52.4
  BOTTOM w0.3: R10.1 6,77.9 11.3,72.6 36.7,72.6 38.7,70.6 46.7,70.6 U8.24
IO13: length 66.5
  BOTTOM w0.3: U8.16 64.42,69.38 66.3,67.5 66.3,63.7 56.75,54.15 SW6.1
IO14: length 63.8
  TOP w0.3: v1(61.3,72.5) 58.3,72.5 51.3,79.5 21.4,79.5 18.3,82.6 v1(18.3,83.1)
  BOTTOM w0.3: U8.13 61.99,73.19 v1(61.3,72.5) ; J4.8 18.3,89.68 v1(18.3,83.1)
IO21: length 41.7
  TOP w0.3: J4.5 16.3,102.1 v1(25.55,92.85)
  BOTTOM w0.3: U8.33 42.7,82.08 42.08,82.7 39.9,82.7 29.6,93 25.7,93 v1(25.55,92.85)
IO25: length 91
  BOTTOM w0.3: U9.6 28.82,6.6 29.12,6.9 30.6,6.9 31.5,6 33.74,6 C19.1 34.79,5.99 38.2,9.4 38.2,33.6 47.4,42.8 47.4,50.7 52.5,55.8 52.5,66 59.2,72.7 59.2,73.8 62.4,77 U8.10
IO26: length 91.4
  BOTTOM w0.3: U8.11 62.63,75.73 60.2,73.3 60.2,72.1 55.5,67.4 55.5,54.7 50.8,50 50.8,43.6 41.4,34.2 41.4,8.3 34.85,1.75 C18.1
IO27: length 75.8
  BOTTOM w0.3: U8.12 63.81,74.4 65.1,74.4 68.05,71.45 68.05,63.15 58.9,54 58.9,45.4 66.75,37.55 SW8.1
IO32: length 24
  BOTTOM w0.3: SW11.1 64.66,79.54 U8.8
IO33: length 26.7
  BOTTOM w0.3: U8.9 64.42,78.27 71.6,71.09 71.6,63.1 SW10.1
IO34: length 88.9
  BOTTOM w0.3: U8.6 63.08,82.08 56.9,75.91 56.9,73.5 47.5,64.1 42.1,64.1 36.6,69.6 22.4,69.6 R19.2 10.63,57.83 SW4.3 10.6,48.37 10.6,41 12.1,39.5 R20.2
IO34_R: length 34.3
  BOTTOM w0.3: SW5.3 39.87,50.3 29.7,50.3 18.9,39.5 R20.1
IO35: length 78.9
  BOTTOM w0.3: R18.2 40.1,41.85 40.65,42.4 40.7,42.4 45.4,47.1 45.4,60.6 ; SW2.3 34.43,67.07 R17.2 43.2,58.4 45.4,60.6 ; 45.4,60.6 57.9,73.1 57.9,75.64 63.08,80.81 U8.7
IO35_R: length 10.3
  BOTTOM w0.3: SW3.3 35.63,34.93 R18.1
IO36: length 70.2
  BOTTOM w0.7: R5.2 R4.1 76.6,41.76 C1.2 70.7,41.8 68.9,43.6 68.9,45.3 84.15,60.55 84.15,65.85 66.74,83.26 C8.2 66.61,84.62 U8.4
IO39: length 94.3
  BOTTOM w0.3: U8.5 64.42,83.35 66.1,81.67 66.1,80.3 82.7,63.7 82.7,61.6 66.5,45.4 66.5,42.2 71.8,36.9 71.8,16.5 R21.1 76.75,11.45 SW9.1
ISEN_CHRGR: length 2.3
  BOTTOM w0.3: U6.5 83.58,42.55 R1.2
RESET: length 86.4
  TOP w0.3: v1(25.8,78.3) 34,78.3 37.8,74.5 49,74.5 v1(50.2,75.7)
  BOTTOM w0.3: C9.2 23.76,85.95 27.65,85.95 ; C9.2 23.71,83.44 R7.1 ; C9.2 23.71,86.79 15.6,94.9 15.6,103.2 14.16,104.64 J4.4 ; v1(50.2,75.7) 50.2,81.3 54.79,85.89 U8.3 ; 27.65,85.95 25.8,84.1 v1(25.8,78.3) ; 27.65,85.95 Q2.3
RTS_N: length 33.6
  TOP w0.3: v1(29.4,80.6) 31.4,80.6 35.7,84.9 35.7,87 v1(41.1,92.4)
  BOTTOM w0.3: U4.3 45.83,99.83 41.1,95.1 v1(41.1,92.4) ; v1(29.4,80.6) R9.2 29,82.2 29,82.2 28.55,82.2 27.6,83.15 Q2.2
RTS_N_R: length 2.6
  BOTTOM w0.3: Q3.1 31.05,82.3 31.05,82.25 R9.1
SPI_CS0: length 51.4
  TOP w0.3: v1(39.6,84.5) 45.4,84.5 v1(48.8,81.1)
  BOTTOM w0.3: U8.29 47.42,77 48.8,78.38 v1(48.8,81.1) ; J4.3 16.92,107.18 v1(39.6,84.5)
SPI_CS1: length 33
  TOP w0.3: v1(42.8,88.1) v1(42.8,86.4)
  BOTTOM w0.3: v1(42.8,86.4) 43.31,85.89 U8.36 ; v1(42.8,88.1) 33.3,97.6 33.3,110.78 J5.P2
SPI_MISO: length 42.6
  TOP w0.3: v1(38.5,86.9) v1(38.5,82.7)
  BOTTOM w0.3: J5.P7 27.45,97.95 v1(38.5,86.9) ; U8.31 46.69,79.6 44.19,79.6 41.79,82 39.2,82 v1(38.5,82.7)
SPI_MOSI: length 55.7
  TOP w0.3: J4.6 v1(16.84,99.56) ; v1(21.4,101.6) 23.4,101.6 v1(31.8,110)
  BOTTOM w0.3: U8.37 46.71,87.2 41.8,87.2 31.8,97.2 v1(31.8,110) 31.85,110.05 J5.P3 ; v1(16.84,99.56) 18.06,99.56 20.1,101.6 v1(21.4,101.6)
SPI_SCK: length 65.1
  TOP w0.3: v1(41.5,83.7) v1(41.5,81) ; J4.7 v1(17.92,97.02) ; v1(20.35,99.45) 20.4,99.5 20.4,101.8 28.6,110 v1(29.7,110)
  BOTTOM w0.3: v1(41.5,81) 41.5,79.9 43.1,78.3 46.72,78.3 U8.30 ; v1(41.5,83.7) 41.5,85.4 29.65,97.25 29.65,110.05 ; 29.65,110.05 J5.P5 ; 29.65,110.05 v1(29.7,110) ; v1(17.92,97.02) v1(20.35,99.45)
STATUS_LED: length 8.3
  TOP w0.3: v1(6,92.1) 6,96.32 D8.2
  BOTTOM w0.3: R10.2 v1(6,92.1)
UART_RXD: length 18.3
  TOP w0.3: v1(50.4,87.3) 50.4,88.2 47.49,91.11 v1(47.49,92)
  BOTTOM w0.3: U8.34 47.42,83.35 50.4,86.33 v1(50.4,87.3) ; U4.1 v1(47.49,92)
UART_TXD: length 18.8
  BOTTOM w0.3: U4.5 48.39,101.12 48.8,100.72 48.8,85.99 47.42,84.62 U8.35
USB_DN: length 12.7
  BOTTOM w0.25: U4.16 53.08,106.33 52.98,106.42 52.44,106.42 50.27,108.59 50.27,111.02 49.95,111.35 D4.2 50.17,111.72 J7.2
USB_DP: length 11.9
  BOTTOM w0.25: J7.3 50.83,111.72 D3.2 51.05,111.35 50.73,111.02 50.73,108.78 52.63,106.88 52.98,106.88 53.08,106.97 U4.15
N00559: length 12.3
  BOTTOM w0.3: D1.C 86.45,42.27 86.42,42.25

## Copper pours and planes (outline as drawn; the poured copper is in the pictures)
GND on GND: 0.5,113.6 99.5,113.6 99.5,108.9 99.49,108.89 99.5,108.8 99.5,108.7 99.5,5.5 98.03,1.97 94.5,0.5 20.5,0.5 20.5,2 14.9,2 14.9,0.5 5.5,0.5 1.97,1.97 0.5,5.5 ; 1 cut-out
P3V3 on PWR: 0.5,114.5 1.97,118.03 5.5,119.5 47.4,119.5 47.7,119.2 47.7,106.8 53.5,101 90,101 96,95 95.9,94.9 95.9,87.1 84.9,76.1 40.1,76.1 40.1,13.1 82.1,13.1 85.64,11.64 87.1,8.1 87.1,5.5 85.67,2 82.2,0.5 20.5,0.5 20.5,2 14.9,2 14.9,0.5 5.5,0.5 1.97,1.97 0.5,5.5 ; 1 cut-out
P3V7_VBAT on PWR: 72.1,42.9 84.4,42.9 99.3,28 99.3,12 96.8,9.5 89.5,9.5 70.9,28.1 70.9,41.7
P5V0_USB on PWR: 47.9,119.5 94.5,119.5 98.03,118.03 99.5,114.5 99.5,37 97.8,35.3 93,35.3 85.7,42.6 85.7,48.2 96,58.5 96,95.2 90,101.2 53.7,101.2 47.9,107
GND_SHLD on GND: 0.5,114.5 1.97,118.03 5.5,119.5 94.5,119.5 98.03,118.03 99.5,114.5 99.5,113.8 0.5,113.8

## Text on the board
Board Geometry/Soldermask Bottom: PWR USB|PWR BAT
Ref Des/Silkscreen Top: LEFT | UP | MicroSD | DOWN | RIGHT | VOL | MicroUSB Type B | MENU | SELECT | START | STATUS LED | AUDIO | B | A | 2.4"LCD
